# Altium PCB BioTemp_PCB.PcbDoc
Units mm, origin at the board's own origin, x right, y up, seen from the top; angles counter-clockwise.
Board outline 74.17 x 69.09 mm, 2 copper layers (Top Layer, Bottom Layer); 24 components, 24 nets, 123 pads, 36 vias.
Unrouted connection lines stored in the file: 21.
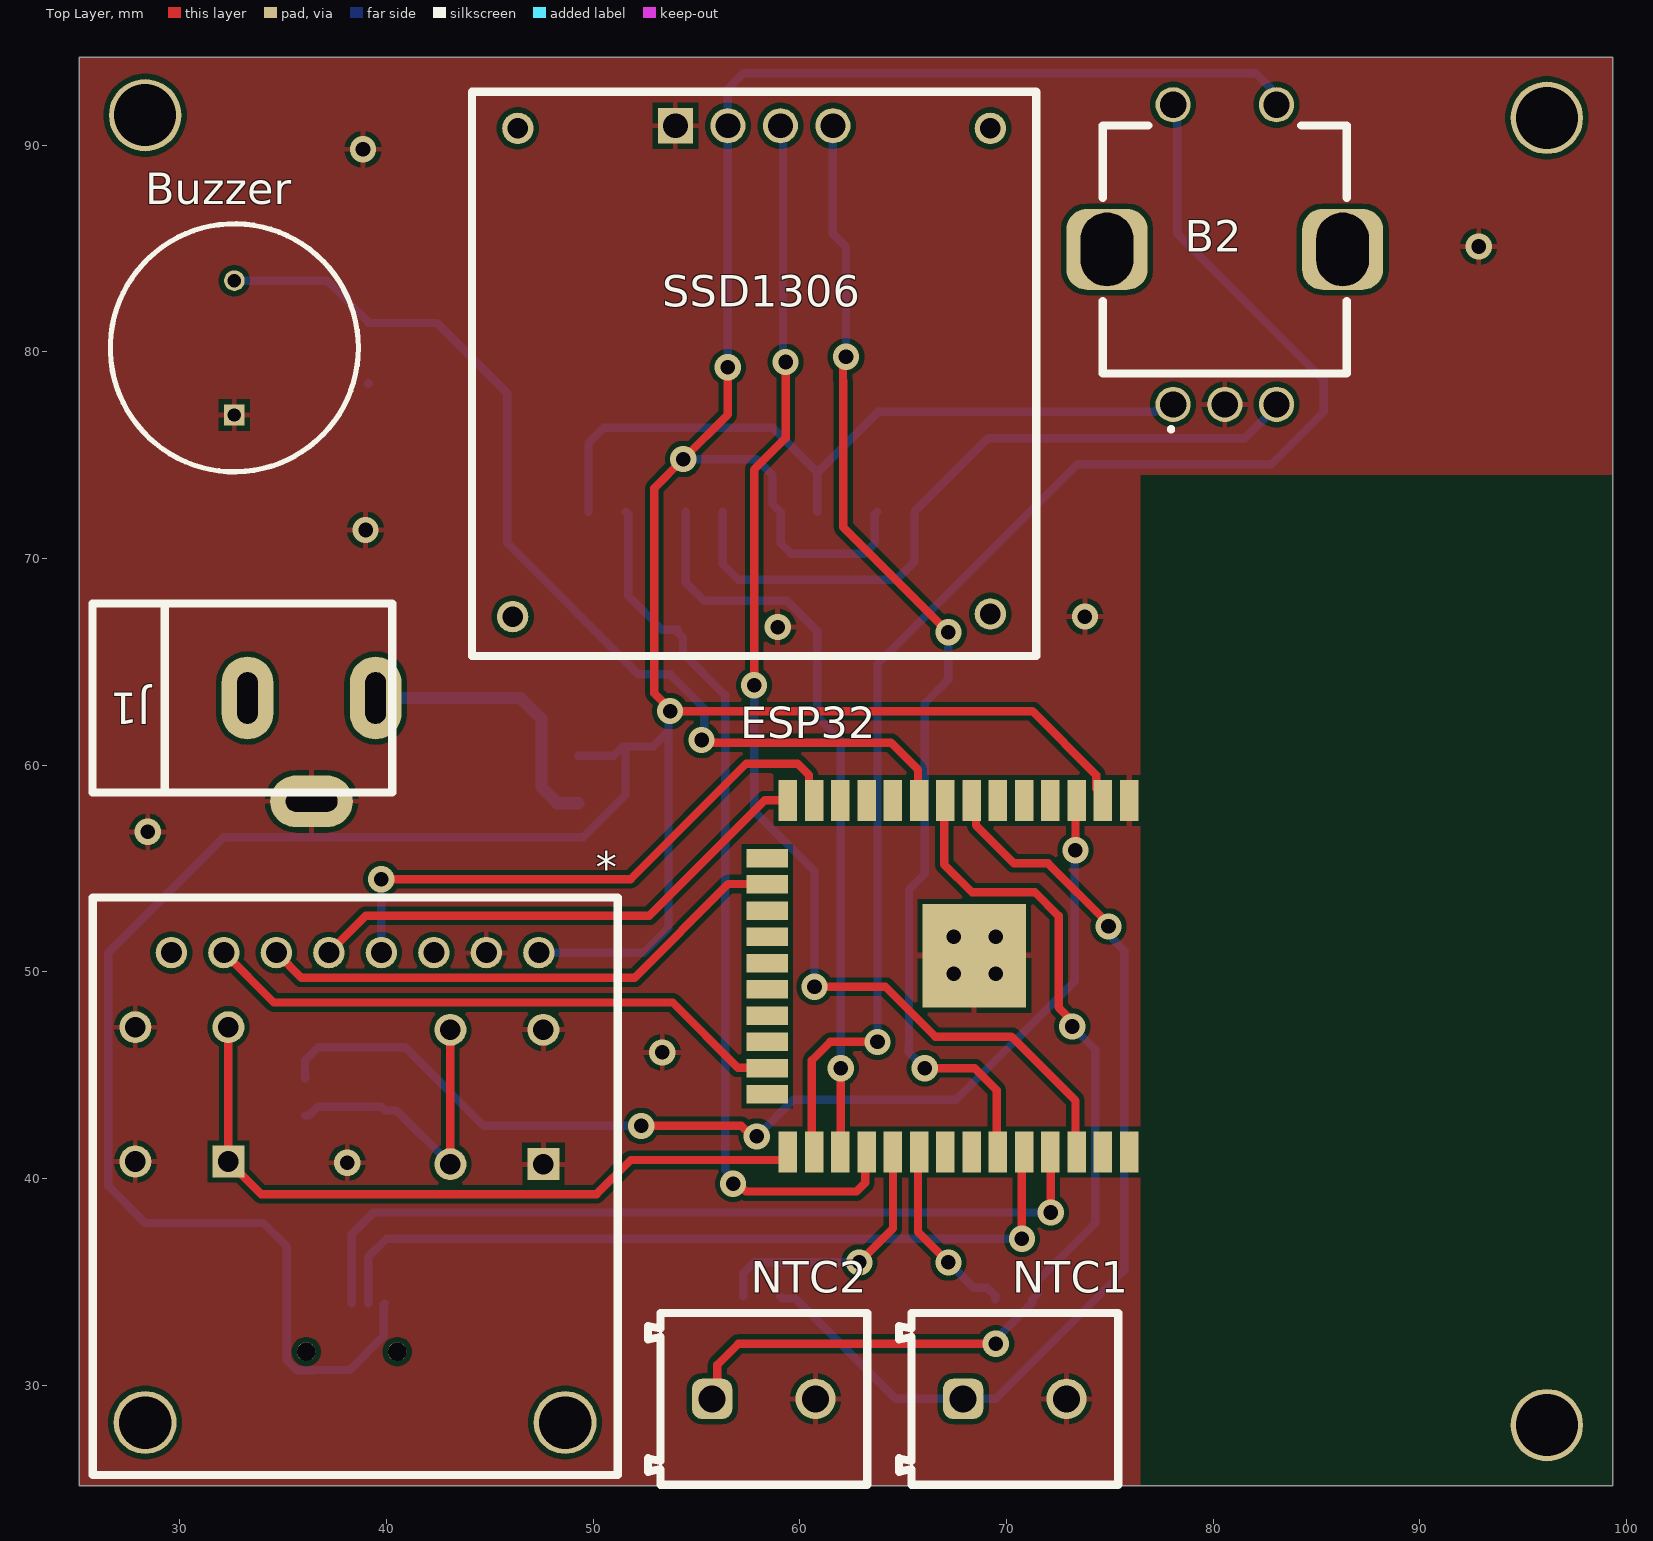
[diagram p0: Top Layer view]
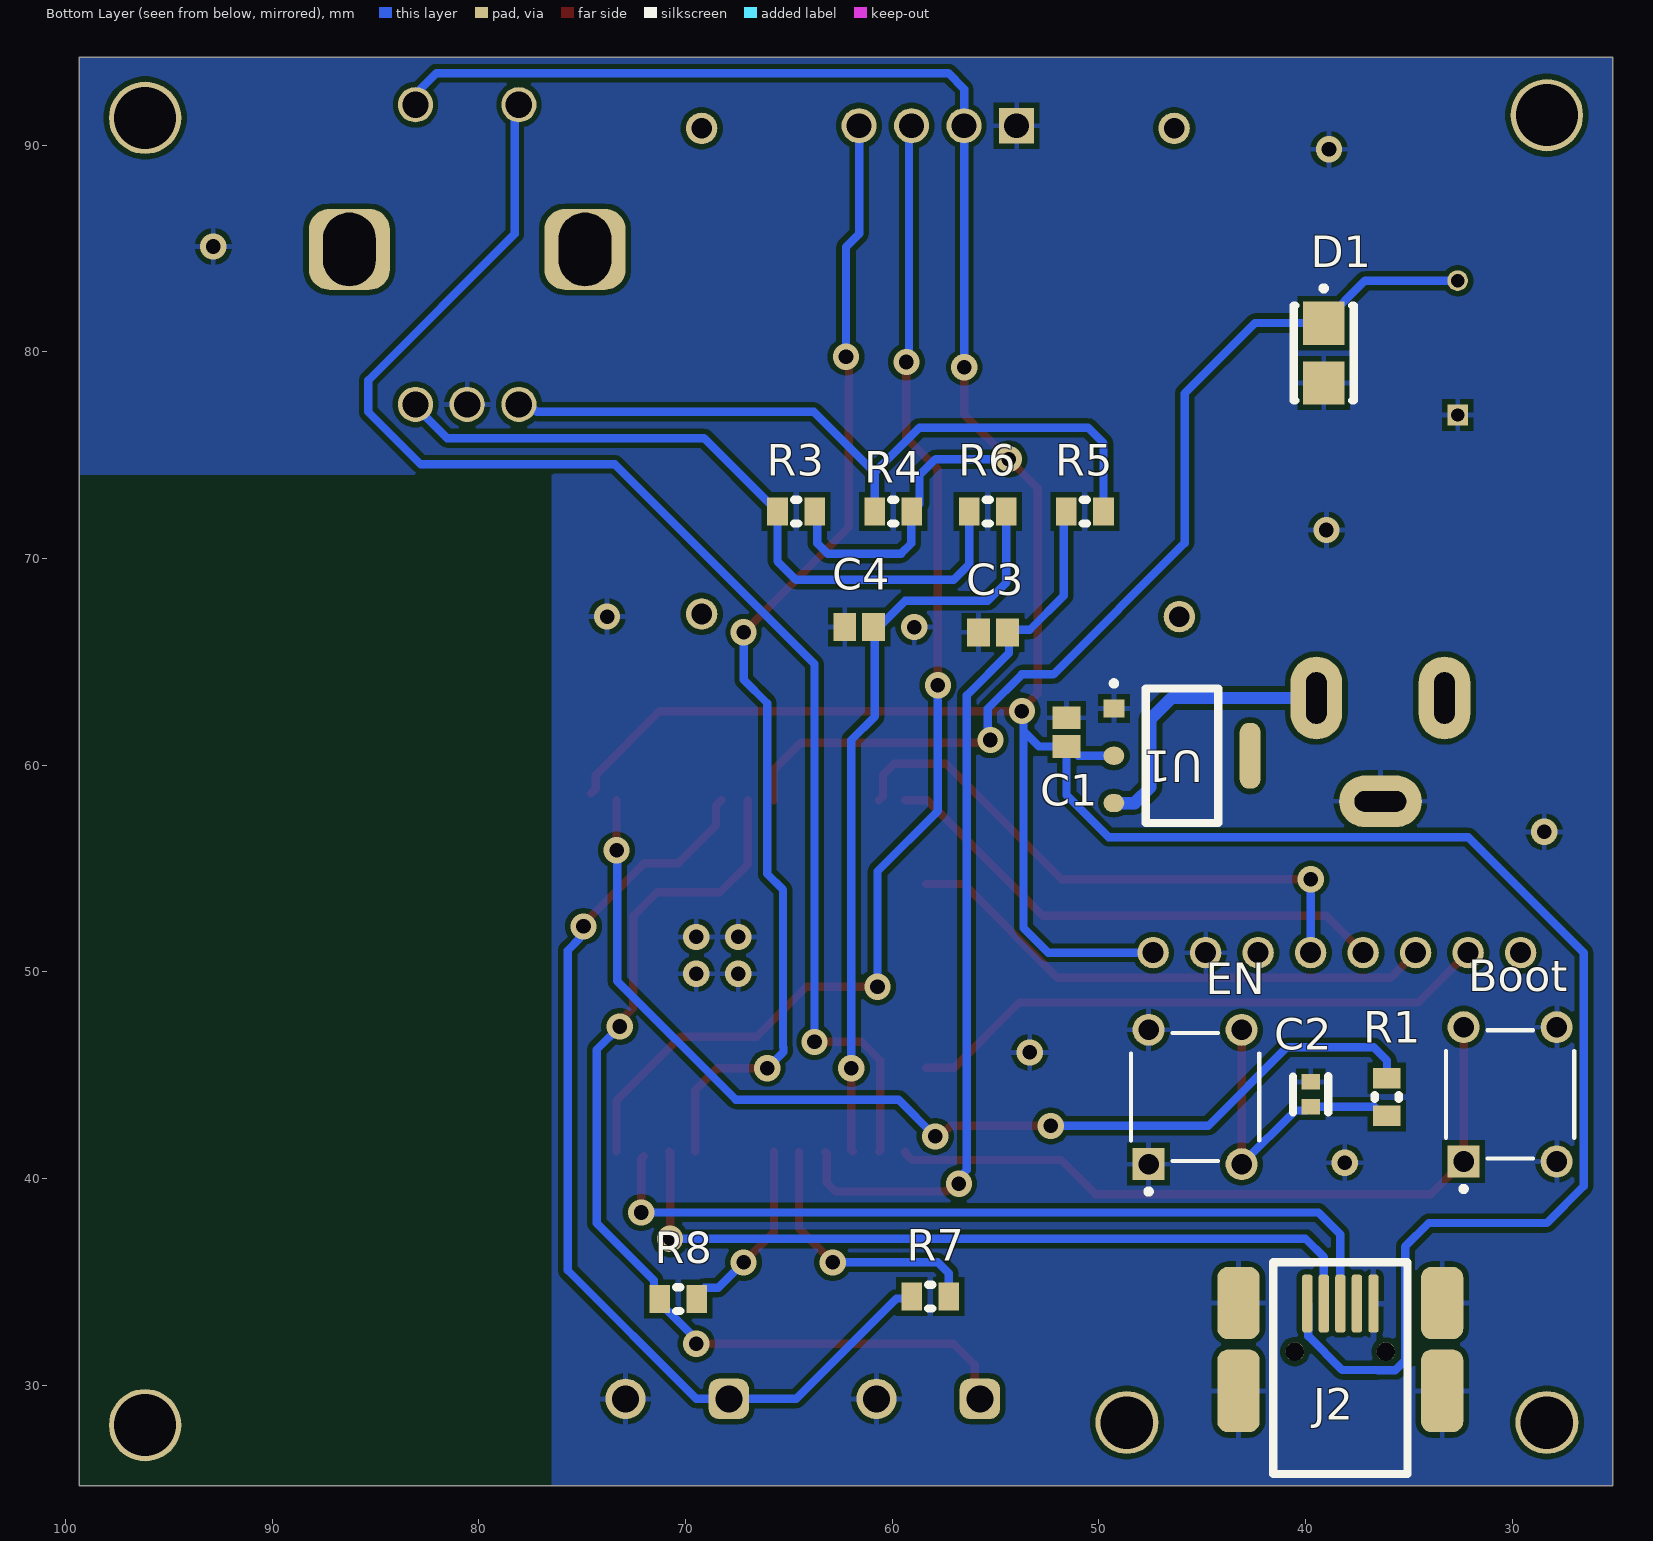
[diagram p1: Bottom Layer view, seen from below]
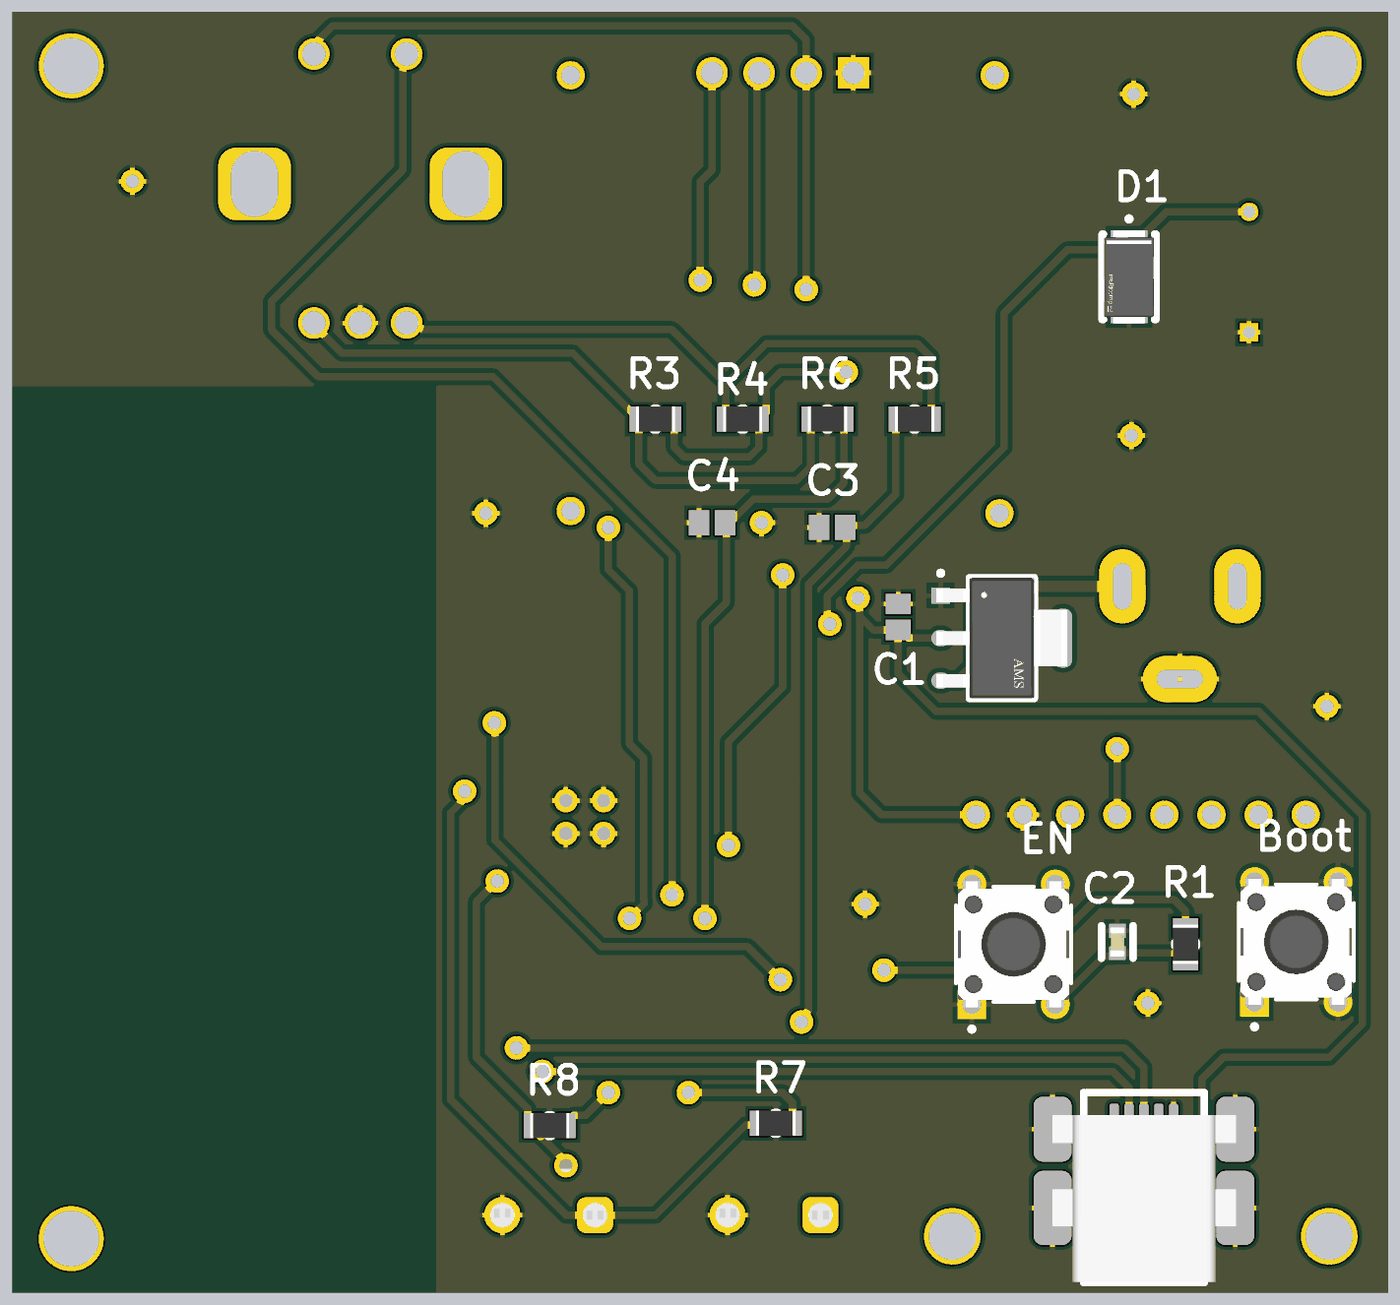
[diagram p2: 3D render of the assembled board from below, using the file's embedded part models]

## Layer stack, top to bottom
Top Solder: solder mask 0.0102, Solder Resist, Dk 3.5
Top Layer: signal copper 0.0356
Dielectric 1: dielectric 0.32, FR-4, Dk 4.8
Bottom Layer: signal copper 0.0356
Bottom Solder: solder mask 0.0102, Solder Resist, Dk 3.5

## Board outline
25.146,25.146 25.146,94.234 99.314,94.234 99.314,25.146

## Design rules (kind name [scope] priority, off if disabled: settings)
Clearance [All] p1: gap=0.254 ignorepadtopadclearanceinfootprint=FALSE except(0: Arc-Hole Track-Hole SMDPad-Hole THPad-Hole Via-Hole Fill-Hole Poly-Hole Region-Hole Text-Hole)
PolygonConnect [All] p1: connectstyle=Relief reliefconductorwidth=0.254 reliefentries=4 polygonreliefangle="90 Angle" airgapwidth=0.254
RoutingVias [All] p1: holewidth=0.711 width=1.27 viastyle="Through Hole" minholewidth=0.711 minwidth=1.27 maxholewidth=0.711 maxwidth=1.27
SolderMaskExpansion [All] p1: expansion=0.102 istentingtop=FALSE
Width [All] p1: maxlimit=1 minlimit=0.254 preferedwidth=0.4 minimp=50.000000 maximp=50.000000 favimp=50.000000
30 further rules are at their usual default settings.

## Components (designator, comment, footprint, x,y, rotation, side; value= is the part's Value field where it differs from the comment)
* "max31865" max31865 51.181,53.594 r180 top
B2 "PEC11H-4020F-S0016" PEC11H4020FS0016 80.558,77.448 r0 top
Boot "B3F-1070" FP-B3F-1070-MFG 30.099,44.069 r270 bottom
Buzzer "WT1205" WT1205 37.639,74.939 r90 top (schematic designator "Buzzer WT1205")
C1 "C0805C103K5RACTU" CAPC2013X88X50LL20T25 51.562,61.595 r270 bottom
C2 "C0603C104M4RACTU" FP-C0603C-CF-MFG 39.748,44.069 r270 bottom value="0.10 μF"
C3 "C0805C103K5RACTU" CAPC2013X88X50LL20T25 55.118,66.421 r180 bottom
C4 "C0805C103K5RACTU" CAPC2013X88X50LL20T25 61.595,66.675 r180 bottom
D1 "1N4007 SMD" FP-1N4007_SMD-IPC_C 39.116,79.936 r270 bottom
EN "B3F-1070" FP-B3F-1070-MFG 45.339,43.942 r270 bottom
ESP32 "WiFi Modules (802.11) SMD Module, ESP32-D0WD, 32Mbits SPI flash, UART mode, PCB antenna   Source:  Datasheet" ESP32WROOM32D 70.42,50.134 r270 top
J1 "" "P4 JACK" 25.644,67.898 r270 top
J2 "67503-1020" MOLX-67503-1020_V 39.913,33.948 r90 bottom
NTC1 "691213710002" 691213710002 70.398,29.337 r0 top
NTC2 "691213710002" 691213710002 58.253,29.337 r0 top
R1 "RC0805FR-0710KL" RESC2013X60X35NL10T20 36.068,43.942 r90 bottom
R3 "RC0805FR-0710KL" RESC2013X60X35NL10T20 64.643,72.263 r180 bottom
R4 "RC0805FR-0710KL" RESC2013X60X35NL10T20 59.944,72.263 r180 bottom
R5 "RC0805FR-0710KL" RESC2013X60X35NL10T20 50.673,72.263 r180 bottom
R6 "RC0805FR-0710KL" RESC2013X60X35NL10T20 55.372,72.263 r180 bottom
R7 "RC0805FR-0710KL" RESC2013X60X35NL10T20 58.155,34.29 r180 bottom
R8 "RC0805FR-0710KL" RESC2013X60X35NL10T20 70.347,34.163 r180 bottom
SSD1306 "SSD1306" SSD1306 44.135,90.932 r270 top
U1 "AMS1117-3.3" FP-AMS1117-IPC_C 45.974,60.452 r180 bottom

## Footprints (in the part's own frame and the unit in brackets; to place one, negate y for a bottom-side part, rotate by r counter-clockwise, add the part's x,y. Pads: shape width x height; smd on the part's side, far side on the other; paste and mask are expansions set on the pad)
691213710002 [mm] "5,00mm - modular - green - Horizontal entry with rising cage clamp -  10,0mm height - 02p"
  rrect50% 1.95x1.95 hole 1.3: 1(-2.5,0)
  round 1.95 hole 1.3: 2(2.5,0)
  silkscreen extent -5.6,-4.15 5,4.15, body extent -5.6,-4.15 5,4.15, height 10.05
CAPC2013X88X50LL20T25 [mm] "Chip Capacitor, 2-Leads, Body 2.00x1.25mm, IPC High Density"
  rect 1.1x1.35 smd: 1(-0.7,0) 2(0.7,0)
  body extent -1.1,-0.72 1.1,0.72, height 0.88
ESP32WROOM32D [mm]
  rect 2x0.9 smd: 1(-8.15,5.51) 2(-8.15,4.24) 3(-8.15,2.97) 4(-8.15,1.7) 5(-8.15,0.43) 6(-8.15,-0.84) 7(-8.15,-2.11) 8(-8.15,-3.38) 9(-8.15,-4.65) 10(-8.15,-5.92) 11(-8.15,-7.19) 12(-8.15,-8.46) 13(-8.15,-9.73) 14(-8.15,-11) 25(8.85,-11) 26(8.85,-9.73) 27(8.85,-8.46) 28(8.85,-7.19) 29(8.85,-5.92) 30(8.85,-4.65) 31(8.85,-3.38) 32(8.85,-2.11) 33(8.85,-0.84) 34(8.85,0.43) 35(8.85,1.7) 36(8.85,2.97) 37(8.85,4.24) 38(8.85,5.51)
  rect 0.9x2 smd: 15(-5.365,-12) 16(-4.095,-12) 17(-2.825,-12) 18(-1.555,-12) 19(-0.285,-12) 20(0.985,-12) 21(2.255,-12) 22(3.525,-12) 23(4.795,-12) 24(6.065,-12)
  rect 5x5 smd: 39(-0.65,-1.99)
FP-1N4007_SMD-IPC_C [mm]
  rect 2.1x2 smd paste+0 mask+0: 1(-1.45,0) 2(1.45,0)
  silkscreen extent -3.25,-1.45 2.3,1.45, body extent -2.52,-1.35 2.52,1.35, height 2.62
FP-AMS1117-IPC_C [mm]
  rect 1.004x0.872 smd paste+0 mask+0: 1(-3.295,2.29)
  rrect100% 1.004x0.872 smd paste+0 mask+0: 2(-3.295,0) 3(-3.295,-2.29)
  rrect87% 1.004x3.182 smd paste+0 mask+0: 4(3.295,0)
  silkscreen extent -3.42,-3.25 1.75,3.62, body extent -3.53,-3.25 3.53,3.25, height 1.8
FP-B3F-1070-MFG [mm]
  rect 1.55x1.55 hole 1 paste-1000 mask+0: 1(3.25,-2.25)
  round 1.55 hole 1 paste-1000 mask+0: 2(-3.25,-2.25) 3(3.25,2.25) 4(-3.25,2.25)
  silkscreen extent -3.1,-3.1 4.7,3.1, body extent -3.85,-3 3.85,3, height 9.9
FP-C0603C-CF-MFG [mm]
  rect 0.75x0.9 smd paste+0 mask+0: 1(-0.6,0) 2(0.6,0)
  silkscreen extent -0.87,-0.85 0.88,0.85, body extent -0.8,-0.4 0.8,0.4, height 0.87
max31865 [mil] "Adafriut max31865 RTD amplifier"
  round 60 hole 40: 1(150,105) 2(250,105) 3(350,105) 4(450,105) 5(550,105) 6(650,105) 7(750,105) 8(850,105)
  round 120 hole 100: 18(100,1000) 19(900,1000)
  silkscreen extent 0,0 1000,1100
MOLX-67503-1020_V [mm] "Mini USB Connector, SMT, Righer Angle"
  rrect50% 2.8x0.5 smd: 1(0,0) 2(0,-0.8) 3(0,-1.6) 4(0,-2.4) 5(0,-3.2)
  rrect50% 3.5x2.05 smd: 6(0.025,3.325) 8(0.025,-6.525)
  rrect50% 4x2.05 smd: 7(-4.225,3.325) 9(-4.225,-6.525)
  round 0.9 hole 0.9 unplated: X(-2.325,-3.8) Y(-2.325,0.6)
  silkscreen extent -8.25,-4.85 2,1.65, body extent -8.22,-6.56 0.78,3.34, height 3.95
"P4 JACK" [mm] "P4 Jack connector"
  oval 4x2.5 hole 1 slot 2.5 at 0 deg paste+0 mask+0.102: 1(4.652,13.83) 3(4.652,7.63)
  oval 2.5x4 hole 1 slot 2.5 at 90 deg paste+0 mask+0.102: 2(9.652,10.73)
  silkscreen extent 0.08,0.13 9.22,14.63
PEC11H4020FS0016 [mm]
  round 1.702 hole 1.27: A1(-2.5,0) B1(2.5,0) C1(0,0) S1(-2.5,14.5) W1(2.5,14.5)
  rrect50% 3.915x3.915 hole 2.54 slot 3.556 at 90 deg: MH1(-5.7,7.5) MH2(5.7,7.5)
  silkscreen extent -5.9,-1.3 5.9,13.5
RESC2013X60X35NL10T20 [mm] "Chip Resistor, 2-Leads, Body 2.1x1.35mm, IPC Medium Density"
  rect 1x1.35 smd: 1(-0.9,0) 2(0.9,0)
  silkscreen extent -0.1,-0.58 0.1,0.58, body extent -1.05,-0.68 1.05,0.67, height 0.6
SSD1306 [mm]
  rect 1.7x1.7 hole 1.2: 0(0,9.84)
  round 1.7 hole 1.2: 1(0,12.38) 2(0,14.92) 3(0,17.46)
  silkscreen extent -1.65,0 25.65,27.3
WT1205 [mm] "Buzzer WT1205"
  round 1 hole 0.65: 1(8.5,5)
  rect 1x1 hole 0.65: 2(2,5)
  silkscreen extent -0.75,-1 11.25,11, body extent -0.76,-1 11.25,11, height 9.5

## Part data
B2: "Encoders ROTARY ENCODER W/BALL SPRING", Manufacturer_Name=Bourns, Mouser Part Number=652-PEC11H4020FS0016, Datasheet Link=https://componentsearchengine.com/Datasheets/2/PEC11H-4020F-S0016.pdf, Geometry.Height=27mm, Manufacturer_Part_Number=PEC11H-4020F-S0016, Mouser Price/Stock=https://www.mouser.co.uk/ProductDetail/Bourns/PEC11H-4020F-S0016?qs=7MVldsJ5Uaz%252B8OdHRKxgZA%3D%3D
Boot EN: library part CMP-08834-000056-1, "SWITCH TACTILE SPST-NO 0.05A 24V", Actuator Color=Black, Contact Current Rating=50mA, Contact Resistance=100mR, Insulation Resistance=100MR, Max Operating Temperature=70°C, Max Voltage Rating (DC)=24V, Min Operating Temperature=-25°C, Operating Force=0.98N, Package Quantity=1000, Actuator Length=6.1mm, Actuator Type=Standard, Contact Material=Gold, Contact Plating=Silver, Current Rating=50mA, Depth=7.7mm, Electrical Life=1000000Cycles, Illumination Type=Non-Illuminated, Lead Free="Lead Free", Length=6mm, Max Current Rating=50mA, Mechanical Life=500000Cycles, Mount="Through Hole", Number of Poles=1, Orientation=Straight, Packaging=Bulk, RoHS Compliant=Yes, Series=B3F, Switch Function=Off-Mom, Switch Travel=0.25mm, Termination="PC Pins", Throw Configuration=SPST, Voltage Rating (DC)=24V, Weight=0.25g
Buzzer: "Buzzer WT1205 87dB 5V"
C1 C3 C4: library part CMP-2007-00266-1, Manufacturer=Kemet, Part Number=C0805C103K5RACTU
C2: library part CMP-2006-03067-2, "CAP CER 0.1UF 16V X7R 0603", Capacitance="0.10 μF", Manufacturer=KEMET, Package=C0603C-CF, Temperature="-55°C to +125°C", Temperature Characteristic=X7R, Temperature Coefficient=30ppm/°C, Temperature Range High=+125°C, Temperature Range Low=-55°C, Tolerance=0.2, Voltage Rating="16 V", Automotive=Yes, Automotive Grade="Grade 1", Category=Cap, ComponentLink2Description=Datasheet, ComponentLink2URL=https://api.kemet.com/component-edge/download/datasheet/C0603C100J5GACAUTO.pdf, Device Class L1="Passive Components", Device Class L2=Capacitors, Device Class L3="Ceramic Capacitors", Digikey Description="CAP CER 0.1UF 16V X7R 0603", Height=0.87mm, Lead Free=Yes, Manufacturer Part Number=C0603C104M4RACTU, Material=Ceramic, Mouser Description="Multilayer Ceramic Capacitors MLCC - SMD/SMT 16volts 0.1uF X7R 20%", Octopart=https://octopart.com/c0603c104m4ractu-kemet-134275, RoHS=TRUE
D1: library part CMP-12389-000001-1, "Rectifier, 1Kv, 1A, Do-214Ac Rohs Compliant: Yes"
ESP32: library part ESP32-WROOM-32D, Manufacturer_Name="Espressif Systems", Package=ESP32WROOM32D, DeviceSetName=ESP32-WROOM-32D, GateName_1=G$1, Height=3.1mm, LibraryName=ESP32-WROOM-32D, Manufacturer_Part_Number=ESP32-WROOM-32D, Mouser_Part_Number=N/A, Mouser_Price-Stock=https://www.mouser.co.uk/ProductDetail/Espressif-Systems/ESP32-WROOM-32D?qs=MLItCLRbWszx2KabkKPu5A%3D%3D, SymbolName_1=ESP32-WROOM-32D
J1: library part "POWER JACK P4"
J2: library part CMP-0411-00002-1, "USB, MINI, SMD, RA KME04-USBMU03A01", Manufacturer=Molex, ComponentLink1Description="Manufacturer URL", ComponentLink1URL=http://www.molex.com/, ComponentLink2Description=Datasheet, ComponentLink2URL=http://www.molex.com/pdm_docs/sd/675031020_sd.pdf, DatasheetVersion="Rev F, 06/2009", Mounting Technology="Surface Mount", PackageDescription="Mini USB Connector, SMT, Righer Angle", PackageReference=67503-1020, PartNumber=67503-1020, Terminal Pitch="0.8 mm"
NTC1 NTC2: library part CMP-1502-02526-2, Color=Green, Current=10A, Max Operating Temperature=105°C, Min Operating Temperature=-40°C, Voltage=300V, Contact Material=Brass, Contact Plating=Tin, Current Rating=10A, Height=10mm, Housing Material=Nylon, Lead Pitch=5mm, Length=8.3mm, Mount="Through Hole", NexarPartId=8917718, Number of Contacts=2, Number of Levels=1, Number of Pins=2, Number of Positions Per Level=2, Packaging=Box, Pitch=5.0038mm, Plating="Brass, Steel", REACH SVHC=Unknown, RoHS=Compliant, Stripping Length=-7mm, Termination=Screw, Voltage Rating=300V, Width=10.6mm, Wire Gauge (Max)=26AWG, Wire Gauge (Min)=16AWG, Wire/Cable Gauge=26AWG
R1 R3 R4 R5 R6 R7 R8: library part CMP-1659-00013-4, "Chip Resistor, 10 KOhm, +/- 1%, 0.125 W, -55 to 155 degC, 0805 (2012 Metric), RoHS, Tape and Reel", Manufacturer=Yageo, Max Operating Temperature="155 degC", Min Operating Temperature="-55 degC", Package Quantity=5000, Voltage Rating="150 V", ComponentLink1Description="Manufacturer URL", ComponentLink1URL=http://www.yageo.com/, ComponentLink2Description=Datasheet, ComponentLink2URL=http://www.yageo.com/documents/recent/PYu-RC_Group_51_RoHS_L_04.pdf, DatasheetVersion="Rev. 4, 02/2016", Height="0.5 mm", Length="2 mm", Mount="Surface Mount", Mounting Technology="Surface Mount", PackageDescription="2-Pin Surface Mounted Device, Body 2 x 1.25 mm", PackageReference=0805, Packaging="Tape and Reel", Pins=2, REACH SVHC="No SVHC", RoHSCompliant=true
SSD1306: "SSD1306 OLED Display 1280x64"
U1: library part CMP-209535-000001-1, "LDO Voltage Regulators 1A, 3.3V", Dropout Voltage=1.1V, Manufacturer="Advanced Monolithic Systems", Max Junction Temp=+125°C, Max Power Dissipation=1.2W, Max Supply Voltage=15V, Nominal Supply Current=5mA, Output Current=1A, Output Voltage=3.3V, Package=AMS1117, Temperature="-40°C to +125°C", Temperature Range Low=-40°C, Automotive=No, Category=IC, ComponentLink2Description=Datasheet, ComponentLink2URL=http://www.advanced-monolithic.com/pdf/ds1117.pdf, Device Class L1="Integrated Circuits (ICs)", Device Class L2="Power Management ICs", Device Class L3="Voltage Regulators - Linear", Height=1.8mm, Ipc Land Pattern Name=SOT229P700X180-4, Lead Free=Yes, Manufacturer Part Number=AMS1117-3.3, Number Of Outputs=1, Octopart=https://octopart.com/ams1117-3.3-advanced+monolithic+systems-25899300, Output Type=Fixed, RoHS=TRUE, Standoff Height=0.64mm, Temperature Range High=+125°C

## Free pads (board coordinates)
  round 3.5 hole 3: 3(96.139,28.067) 4(96.139,91.313) 5(28.321,91.44)
  round 1.524 hole 1: 6(46.101,67.183) 6(46.355,90.805) 6(69.215,67.31) 6(69.215,90.805)

## Via types
v1: diameter 1.27, hole 0.711, Top Layer to Bottom Layer, 36 vias

## Nets (pads, with @x,y where several pads share a name; then routed paths per layer and width w, separated by ;. In a path a pad name is that pad's centre, name@x,y a point inside that pad or via, vN(x,y) a via of type N, cw(c..) or ccw(c..) an arc to the next point about the centre after c; other vN are vias at no path point)
ADC1: ESP32.7 NTC1.1 R7.1 | length 48.1
  Top Layer w0.4: ESP32.7@68.248,58.301 68.515,58.034 68.515,57.088 70.358,55.245 72.009,55.245 74.93,52.324 v1(74.93,52.197)
  Bottom Layer w0.4: R7.1 59.152,34.193 59.787,34.193 64.643,29.337 NTC1.1 69.469,29.337 75.692,35.56 75.692,51.032 75.124,51.6 75.124,52.003 v1(74.93,52.197)
ADC2: ESP32.8 NTC2.1 R8.1 | length 48.8
  Top Layer w0.4: NTC2.1 56.007,29.591 56.007,30.988 57.023,32.004 v1(69.469,32.004) ; ESP32.8@66.978,58.301 66.978,55.196 68.326,53.848 71.374,53.848 72.517,52.705 72.517,48.281 73.172,47.626 v1(73.172,47.351)
  Bottom Layer w0.4: v1(69.469,32.004) 69.469,32.21 71.247,33.988 R8.1 71.519,34.435 71.519,35.07 74.295,37.846 74.295,46.228 v1(73.172,47.351)
Buzzer: Buzzer.1 D1.1 ESP32.9 | length 49.7
  Top Layer w0.4: v1(55.245,61.214) 55.372,61.087 64.399,61.087 65.708,59.778 ESP32.9@65.708,58.301
  Bottom Layer w0.4: Buzzer.1 37.113,83.439 39.116,81.436 D1.1 42.439,81.386 45.847,77.978 45.847,70.739 52.197,64.389 53.721,64.389 55.372,62.738 55.372,61.341 v1(55.245,61.214)
CLK: C3.2 ESP32.28 R5.1 | length 43.2
  Top Layer w0.4: v1(56.769,39.751) 57.004,39.751 57.385,39.37 62.738,39.37 63.161,39.793 63.161,41.214 ESP32.28
  Bottom Layer w0.4: R5.1 51.689,72.147 51.689,68.199 53.34,66.548 C3.2@54.087,66.548 ; C3.2@54.087,66.433 54.345,66.175 54.345,65.416 56.388,63.373 56.388,40.407 56.769,40.026 v1(56.769,39.751)
CS: *.7 ESP32.23 | length 28.5
  Top Layer w0.4: *.7 34.544,48.514 53.848,48.514 57.006,45.356 ESP32.23@58.358,45.356
DT: C4.2 ESP32.27 R6.2 | length 36.4
  Top Layer w0.4: ESP32.27@61.898,41.301 61.976,41.379 v1(61.976,45.339)
  Bottom Layer w0.4: R6.2 54.472,68.845 55.372,67.945 59.371,67.945 60.833,66.483 60.833,62.357 61.976,61.214 v1(61.976,45.339)
EN: ESP32.3 R1.2 | length 52
  Top Layer w0.4: v1(52.324,42.545) 57.169,42.545 57.677,42.037 v1(57.912,42.037) ; v1(73.328,55.88) ESP32.3@73.328,58.301
  Bottom Layer w0.4: R1.2 36.056,44.854 36.056,45.708 36.703,46.355 40.894,46.355 44.704,42.545 v1(52.324,42.545) ; v1(57.912,42.037) 59.69,43.815 67.564,43.815 73.304,49.555 73.304,55.855 v1(73.328,55.88)
GND: *.2 B2.C1 Boot.3 Boot.4 Buzzer.2 C1.1 C2.1 C3.1 C4.1 D1.2 EN.1 EN.2 ESP32.1 ESP32.39 J1.2 J2.5 J2.6 J2.7 J2.8 J2.9 NTC1.2 NTC2.2 SSD1306.0 U1.1 | length 0
  Bottom Layer w0.4: D1.2@39.116,78.436 D1.2
  other v1: 38.1,40.767 53.34,46.101 67.437,49.911 69.469,49.911 67.437,51.689 69.469,51.689 28.448,56.769 58.928,66.675 73.787,67.183 38.989,71.374 92.837,85.09 38.862,89.789
MISO: *.5 ESP32.14 | length 25.2
  Top Layer w0.4: *.5 38.989,52.705 52.705,52.705 58.301,58.301 ESP32.14@59.358,58.301
Mode: Boot.1 Boot.2 ESP32.25 | length 35.1
  Top Layer w0.4: Boot.2 Boot.1 33.925,39.243 50.165,39.243 51.816,40.894 59.035,40.894 59.358,41.217 ESP32.25@59.358,41.301
MOSI: *.6 ESP32.16 | length 26.1
  Top Layer w0.4: *.6 35.887,49.711 51.997,49.711 56.532,54.246 ESP32.16@58.358,54.246
NetB2_A1: B2.A1 R4.1 R5.2 | length 36.3
  Bottom Layer w0.4: R5.2 49.773,75.576 50.524,76.327 58.674,76.327 60.844,74.157 ; R4.1 60.844,74.157 ; B2.A1@78.257,77.622 77.806,77.171 77.267,77.171 77.185,77.089 63.776,77.089 60.844,74.157
NetB2_B1: B2.B1 R3.1 R6.1 | length 34.8
  Bottom Layer w0.4: R6.1 56.272,69.712 57.023,68.961 64.643,68.961 65.543,69.861 R3.1 69.099,75.819 81.534,75.819 B2.B1@83.257,77.542
NetC2_2: C2.2 EN.3 EN.4 R1.1 | length 14.8
  Top Layer w0.4: EN.3 EN.4
  Bottom Layer w0.4: R1.1 36.243,43.042 36.67,43.469 C2.2 39.923,43.294 40.487,43.294 EN.3
NetJ1_1: J1.1 U1.3 | length 13.8
  Bottom Layer w0.6: J1.1 46.482,63.246 47.498,62.23 47.498,58.928 48.264,58.162 U1.3
NTC1: ESP32.29 R7.2 | length 13
  Top Layer w0.4: v1(62.865,35.941) 64.5,37.576 ESP32.29
  Bottom Layer w0.4: R7.2 57.255,35.411 57.785,35.941 v1(62.865,35.941)
NTC2: ESP32.30 R8.2 | length 9.1
  Top Layer w0.4: ESP32.30@65.708,41.301 65.708,37.416 v1(67.183,35.941)
  Bottom Layer w0.4: v1(67.183,35.941) 68.413,34.711 69.074,34.711 69.447,34.338 R8.2
RX: ESP32.34 J2.2 | length 38.5
  Top Layer w0.4: v1(70.739,37.084) 70.739,41.252 ESP32.34@70.788,41.301
  Bottom Layer w0.4: J2.2 39.113,36.192 40.005,37.084 v1(70.739,37.084)
SCK: *.4 ESP32.13 | length 28.1
  Top Layer w0.4: v1(39.751,54.483) 51.816,54.483 57.404,60.071 59.895,60.071 60.44,59.526 60.44,58.489 ESP32.13@60.628,58.301
  Bottom Layer w0.4: *.4 v1(39.751,54.483)
SCL: ESP32.36 SSD1306.2 | length 61
  Top Layer w0.4: v1(57.785,63.858) 57.785,74.295 59.309,75.819 v1(59.309,79.502) ; v1(60.706,49.276) 64.135,49.276 66.548,46.863 70.231,46.863 73.328,43.766 ESP32.36@73.328,41.301
  Bottom Layer w0.4: v1(57.785,63.858) 57.785,57.785 60.706,54.864 v1(60.706,49.276) ; SSD1306.2 59.182,90.805 59.182,79.629 v1(59.309,79.502)
SDA: ESP32.33 SSD1306.3 | length 56
  Top Layer w0.4: v1(62.23,79.756) 62.081,79.607 62.081,78.613 62.103,78.591 62.103,71.501 v1(67.183,66.421) ; v1(66.04,45.339) 68.453,45.339 69.518,44.274 ESP32.33@69.518,41.301
  Bottom Layer w0.4: SSD1306.3 61.595,85.701 62.23,85.066 v1(62.23,79.756) ; v1(66.04,45.339) 65.256,46.123 65.256,46.333 65.278,46.355 65.278,53.975 66.04,54.737 66.04,62.992 67.183,64.135 v1(67.183,66.421)
SW: B2.S1 ESP32.26 | length 71.1
  Top Layer w0.4: ESP32.26@60.628,41.301 60.579,41.35 60.579,45.72 61.468,46.609 v1(63.754,46.609)
  Bottom Layer w0.4: v1(63.754,46.609) 63.754,64.897 73.406,74.549 82.804,74.549 85.344,77.089 85.344,78.613 78.257,85.7 B2.S1@78.257,92.344
TX: ESP32.35 J2.3 | length 40.4
  Top Layer w0.4: ESP32.35@72.009,41.078 72.136,40.951 v1(72.136,38.354)
  Bottom Layer w0.4: J2.3 38.313,37.297 39.37,38.354 v1(72.136,38.354)
Vcc: *.1 B2.W1 C1.2 ESP32.2 J2.1 R3.2 R4.2 SSD1306.1 U1.2 | length 183
  Top Layer w0.4: v1(56.515,79.248) 56.515,76.962 v1(54.356,74.803) 52.959,73.406 52.959,63.465 53.721,62.703 v1(53.721,62.611) 71.247,62.611 74.337,59.521 74.337,58.86 ESP32.2@74.571,58.626
  Bottom Layer w0.4: J2.1 39.863,33.898 39.863,32.37 38.227,30.734 36.502,30.734 36.487,30.719 35.663,30.719 35.179,31.203 35.179,36.703 34.036,37.846 28.321,37.846 26.543,39.624 26.543,50.927 32.131,56.515 49.53,56.515 51.562,58.547 C1.2 ; *.1 52.451,50.927 53.64,52.116 53.64,61.641 ; U1.2 C1.2@50.994,60.452 ; C1.2@51.087,60.545 51.437,60.895 C1.2 ; v1(53.721,62.611) 53.64,62.53 53.64,61.641 ; v1(54.356,74.803) 57.891,74.803 58.671,74.023 58.671,72.636 R4.2 59.073,72.234 59.073,70.721 59.563,70.231 63.119,70.231 63.627,70.739 63.627,72.147 R3.2 ; v1(56.515,79.248) SSD1306.1 56.515,92.71 57.28,93.475 80.295,93.475 80.298,93.472 82.041,93.472 82.931,92.582 B2.W1@83.019,92.582 ; C1.2 52.894,60.895 53.64,61.641
pads on no net: *.3 *.8 *.18 *.19 B2.MH1 B2.MH2 ESP32.4 ESP32.5 ESP32.6 ESP32.10 ESP32.11 ESP32.12 ESP32.15 ESP32.17 ESP32.18 ESP32.19 ESP32.20 ESP32.21 ESP32.22 ESP32.24 ESP32.31 ESP32.32 ESP32.37 ESP32.38 J1.3 J2.4 J2.X J2.Y U1.4

## Polygon pours and split planes (outlines as drawn)
GND on Top Layer "GND_L01_P000" (solid, pour order 0): 25.146,25.146 25.146,94.234 99.314,94.234 99.314,25.146
GND on Bottom Layer "GND_L02_P001" (solid, pour order 1): 25.146,25.146 25.146,94.234 99.314,94.234 99.314,25.146

## Other copper
Multi-Layer:
  pour cut-out: 76.454,74.041 99.314,74.041 99.314,25.146 76.454,25.146